# EAGLE board subpanel (EAGLE 6.3)
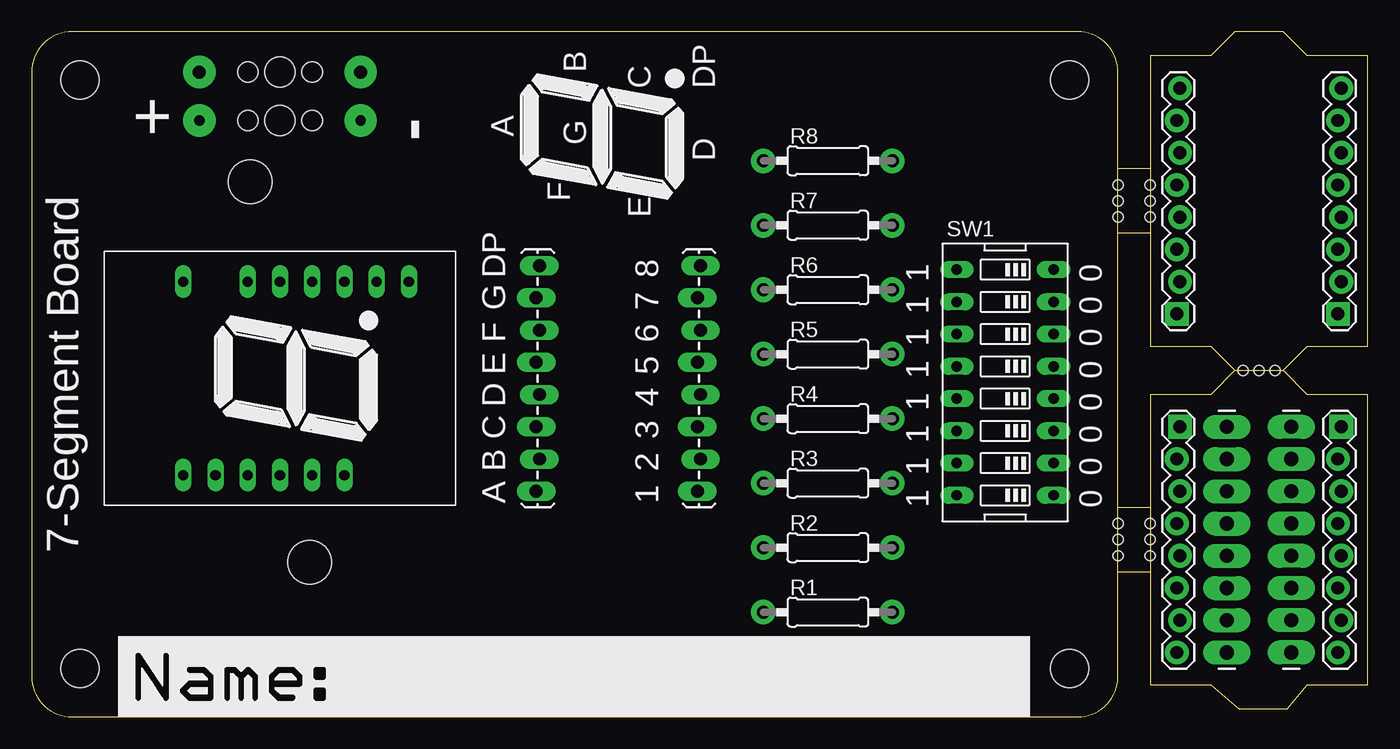
[diagram p0: board, top side]
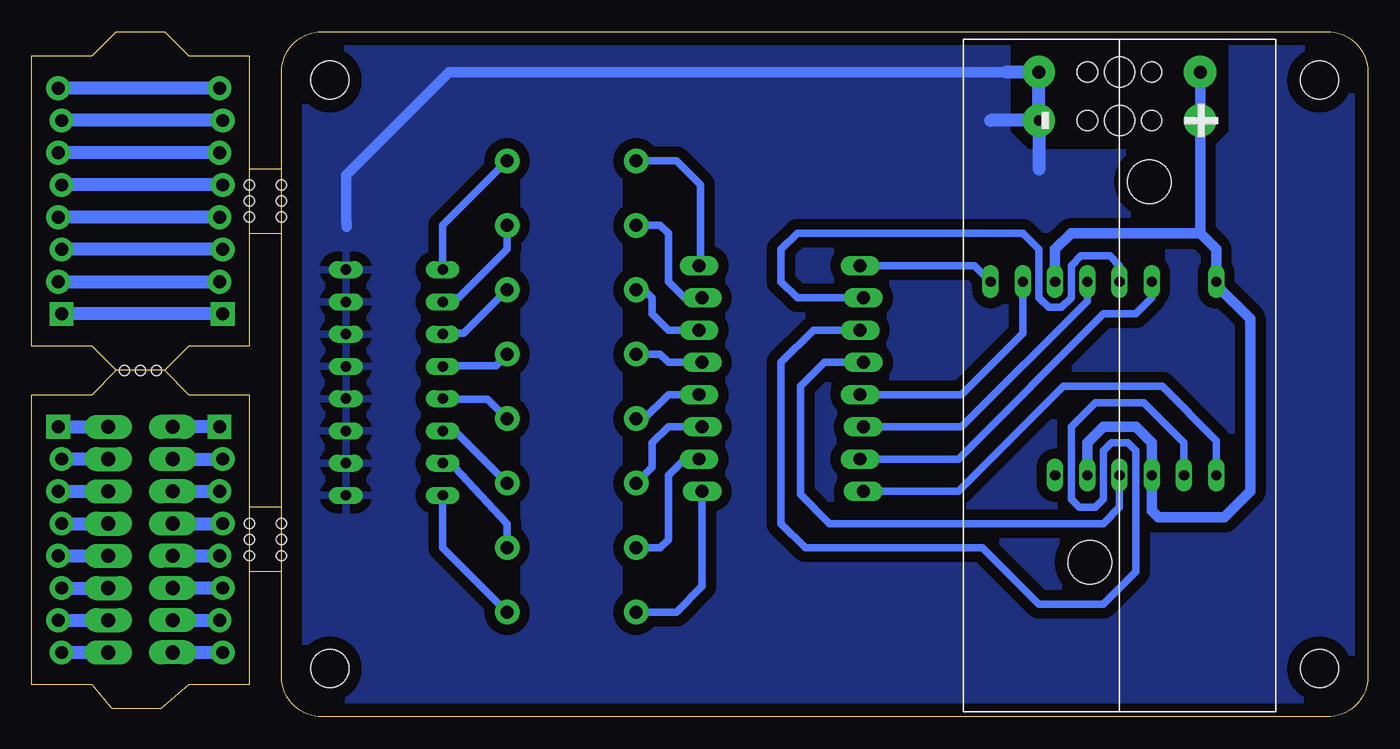
[diagram p1: board, bottom side, seen from below]

Size 105.28 x 53.98 mm. Coordinates in mm from the lower left corner, seen from the top.
Outline: 98.62,27.3 100.52,25.4 105.28,25.4 105.28,2.54 100.52,2.54 98.94,0.64 95.12,0.64 92.9,2.54 88.14,2.54 88.14,25.4 92.9,25.4 94.81,27.3
Outline: 85.6,11.43 85.6,3.2 arc-90 82.4,0 3.2,0 arc-90 0,3.2 0,50.78 arc-90 3.2,53.98 82.4,53.98 arc-90 85.6,50.78 85.6,43.18
Outline: 85.6,11.43 85.6,16.51
Outline: 85.6,16.51 85.6,38.1
Outline: 85.6,38.1 85.6,43.18
Outline: 94.81,27.3 92.9,29.21 88.14,29.21 88.14,52.07 92.9,52.07 94.81,53.97 98.62,53.97 100.52,52.07 105.28,52.07 105.28,29.21 100.52,29.21 98.62,27.3
Outline: 94.81,27.3 98.62,27.3
Outline: 88.14,38.1 85.6,38.1
Outline: 88.14,43.18 85.6,43.18
Outline: 85.6,16.51 88.14,16.51
Outline: 85.6,11.43 88.14,11.43
Copper layers (1*16): Top 0.035mm / dielectric 1.5mm / Bottom 0.035mm
Design rules "default *": minimum track width 10mil, minimum drill 24mil, track to track 8mil, track to pad 8mil, pad to pad 8mil, via to via 8mil, smd to smd 8mil, copper to edge 40mil, drill to drill 8mil, minimum pad ring 10mil, minimum via ring 8mil, stop-mask expansion 4mil, vias tented up to drill 0mil, thermal gap 30mil
Net classes: 1 larger: width 0.813 mm
Holes 3 mm at 3.81,3.81 3.81,50.17 81.79,3.81 81.79,50.17
Holes 1.6 mm at 17.02,50.8 22.1,50.8 22.1,46.99 17.02,46.99
Holes 2.4 mm at 19.56,50.8 19.56,46.99
Holes 0.8 mm at 95.44,27.3 96.71,27.3 97.98,27.3 88.14,41.91 88.14,40.64 88.14,39.37 85.6,41.91 85.6,40.64 85.6,39.37 85.6,15.24 85.6,13.97 85.6,12.7 88.14,12.7 88.14,13.97 88.14,15.24
bRestrict: area 28.4,35.6 to 29.7,38.1; area 17,35.6 to 19.6,36.8; area 18.3,14 to 20.8,15.2; area 14.5,39.4 to 15.8,45.7; area 53.9,8.9 to 57.7,43.2; area 67.8,8.9 to 71.6,43.2

## Footprints (pad centres in the part's own frame; a part is rotated, then mirrored left to right if it is on the bottom)
7SEG-0.8IN = drill 0.8 long: 1 -7.62,7.62; 2 -7.62,5.08; 3 -7.62,2.54; 4 -7.62,0; 5 -7.62,-2.54; 6 -7.62,-5.08; 9 7.62,-10.16; 10 7.62,-7.62; 11 7.62,-5.08; 12 7.62,-2.54; 13 7.62,0; 14 7.62,2.54; 16 7.62,7.62
1X08_LOCK = drill 1.016 pad 1.88 square: 1 0,0.127 | drill 1.016 pad 1.88: 2 2.54,-0.127; 3 5.08,0.127; 4 7.62,-0.127; 5 10.16,0.127; 6 12.7,-0.127; 7 15.24,0.127; 8 17.78,-0.127
1X08_LONGPADS = drill 1.118 pad 1.88 long: 1 0,0; 2 2.54,0; 3 5.08,0; 4 7.62,0; 5 10.16,0; 6 12.7,0; 7 15.24,0; 8 17.78,0
1X08_LOCK_LONGPADS = drill 1.016 long: 1 0,0.127; 2 2.54,-0.127; 3 5.08,0.127; 4 7.62,-0.127; 5 10.16,0.127; 6 12.7,-0.127; 7 15.24,0.127; 8 17.78,-0.127
0207/10 = drill 1 pad 1.93: 1 -5.08,0; 2 5.08,0
EDG-08 = drill 0.813 long: 1 -8.89,-3.81; 2 -6.35,-3.81; 3 -3.81,-3.81; 4 -1.27,-3.81; 5 1.27,-3.81; 6 3.81,-3.81; 7 6.35,-3.81; 8 8.89,-3.81; 9 8.89,3.81; 10 6.35,3.81; 11 3.81,3.81; 12 1.27,3.81; 13 -1.27,3.81; 14 -3.81,3.81; 15 -6.35,3.81; 16 -8.89,3.81
AA-2 = drill 1.02 pad 2.54: N 0,12.7; P 0,0 | hole 3.45: -8.64,4; -38.61,8.7

## Placement (x,y rotation side)
D1  [7SEG-0.8IN]  19.56,26.67 90 top
JP1  [1X08_LOCK]  103.06,22.86 270 top
JP2  [1X08_LOCK]  90.36,22.86 270 top
JP3  [1X08_LONGPADS]  99.25,5.08 90 top
JP4  [1X08_LONGPADS]  94.17,22.86 270 top
JP5  [1X08_LOCK_LONGPADS]  39.88,17.78 90 top
JP6  [1X08_LOCK_LONGPADS]  52.58,17.78 90 top
JP7  [1X08_LOCK]  90.36,31.75 90 top
JP8  [1X08_LOCK]  103.06,31.75 90 top
R1  [0207/10]  62.74,8.26 180 top
R2  [0207/10]  62.74,13.34 180 top
R3  [0207/10]  62.74,18.41 180 top
R4  [0207/10]  62.74,23.5 180 top
R5  [0207/10]  62.74,28.57 180 top
R6  [0207/10]  62.74,33.65 180 top
R7  [0207/10]  62.74,38.73 180 top
R8  [0207/10]  62.74,43.81 180 top
SW1  [EDG-08]  76.71,26.35 90 top
U$1  AAA-2  [AA-2]  13.21,50.8 90 bottom

## Library data of the parts
D1 R1-R8 = SwitchAndLockingPins
JP1-JP8 = SparkFun-Connectors
SW1 = special
U$1 = DoubleAAA

## Nets
GND [larger]: SW1.1 SW1.2 SW1.3 SW1.4 SW1.5 SW1.6 SW1.7 SW1.8 U$1.N
N$1: JP1.1 JP3.8
N$2: JP1.2 JP3.7
N$3: JP1.3 JP3.6
N$4: JP1.4 JP3.5
N$5: JP1.5 JP3.4
N$6: JP1.6 JP3.3
N$7: JP1.7 JP3.2
N$8: JP1.8 JP3.1
N$9: JP2.1 JP4.1
N$10: JP2.2 JP4.2
N$11: JP2.3 JP4.3
N$12: JP2.4 JP4.4
N$13: JP2.5 JP4.5
N$14: JP2.6 JP4.6
N$15: JP2.7 JP4.7
N$16: JP2.8 JP4.8
N$17: JP6.1 R1.2
N$18: JP6.2 R2.2
N$20: JP6.3 R3.2
N$21: JP6.4 R4.2
N$22: JP6.5 R5.2
N$23: JP6.6 R6.2
N$24: JP6.7 R7.2
N$25: JP6.8 R8.2
N$26: D1.9 JP5.8
N$27: D1.13 JP5.7
N$28: D1.2 JP5.6
N$29: D1.4 JP5.5
N$30: D1.10 JP5.4
N$31: D1.12 JP5.3
N$32: D1.14 JP5.2
N$33: D1.1 JP5.1
N$34: R1.1 SW1.16
N$35: R2.1 SW1.15
N$36: R3.1 SW1.14
N$37: R4.1 SW1.13
N$38: R5.1 SW1.12
N$39: R6.1 SW1.11
N$40: R7.1 SW1.10
N$41: R8.1 SW1.9
N$47: JP7.8 JP8.8
N$48: JP7.7 JP8.7
N$49: JP7.6 JP8.6
N$50: JP7.5 JP8.5
N$51: JP7.4 JP8.4
N$52: JP7.3 JP8.3
N$53: JP7.2 JP8.2
N$54: JP7.1 JP8.1
VCC [larger]: D1.3 D1.5 D1.11 D1.16 U$1.P

## Tracks (layer width: path | path; a pad name or v marks a point on that pad's centre or on a via)
GND  (via drill 0.8 pad 2.54)
  Bottom 0.813: 28.45,50.8 72.39,50.8 80.52,42.67 80.52,39.37 80.46,38.61
  Bottom 1.016: v25.91,46.99 25.91,43.18 | v25.91,46.99 U$1.N 28.45,50.8 | v25.91,46.99 29.72,46.99
  pour Bottom (isolate 0.813, rank 5): 83.69,1.27 83.69,53.34 28.45,53.34 28.45,46.02 26.88,44.45 12.24,44.45 10.67,46.02 10.67,53.34 0.51,53.34 0.51,1.27
N$1
  Bottom 1.016: JP1.1 JP3.8
N$2
  Bottom 1.016: JP3.7 JP1.2
N$3
  Bottom 1.016: JP1.3 JP3.6
N$4
  Bottom 1.016: JP1.4 JP3.5
N$5
  Bottom 1.016: JP1.5 JP3.4
N$6
  Bottom 1.016: JP1.6 JP3.3
N$7
  Bottom 1.016: JP1.7 JP3.2
N$8
  Bottom 1.016: JP1.8 JP3.1
N$9
  Bottom 1.016: JP2.1 JP4.1
N$10
  Bottom 1.016: JP4.2 JP2.2
N$11
  Bottom 1.016: JP4.3 JP2.3
N$12
  Bottom 1.016: JP4.4 JP2.4
N$13
  Bottom 1.016: JP4.5 JP2.5
N$14
  Bottom 1.016: JP2.6 JP4.6
N$15
  Bottom 1.016: JP4.7 JP2.7
N$16
  Bottom 1.016: JP4.8 JP2.8
N$17
  Bottom 0.61: JP6.1 52.45,10.29 54.48,8.26 R1.2
N$18
  Bottom 0.61: 52.58,20.32 JP6.2 53.85,20.32 55.12,19.05 55.12,13.97 55.76,13.34 R2.2
N$20
  Bottom 0.61: R3.2 56.39,19.68 56.39,21.59 55.12,22.86 JP6.3
N$21
  Bottom 0.61: JP6.4 55.12,25.4 57.02,23.5 R4.2
N$22
  Bottom 0.61: JP6.5 55.12,27.94 55.76,28.57 R5.2
N$23
  Bottom 0.61: JP6.6 55.12,30.48 56.39,31.75 56.39,33.02 57.02,33.65 R6.2
N$24
  Bottom 0.61: JP6.7 53.85,33.02 55.12,34.29 55.12,38.1 55.76,38.73 R7.2
N$25
  Bottom 0.61: JP6.8 52.58,35.69 52.58,41.91 54.48,43.81 R8.2
N$26
  Bottom 0.61: JP5.8 30.99,35.56 D1.9
N$27
  Bottom 0.61: D1.13 19.56,35.56 20.32,36.32 22.61,36.32 23.37,35.56 23.37,33.02 24.13,32.26 25.15,32.26 25.91,33.02 25.91,36.83 27.18,38.1 44.96,38.1 46.23,36.83 46.23,34.29 44.96,33.02 JP5.7
N$28
  Bottom 0.61: D1.2 14.48,21.59 17.66,24.77 21.46,24.77 23.37,22.86 23.37,17.14 22.73,16.51 21.46,16.51 20.83,17.14 20.83,20.96 20.2,21.59 18.93,21.59 18.29,20.96 18.29,11.43 20.83,8.89 25.91,8.89 30.36,13.34 44.33,13.34 46.23,15.24 46.23,27.94 43.69,30.48 JP5.6
N$29
  Bottom 0.61: D1.4 19.56,16.51 20.83,15.24 42.42,15.24 44.71,17.53 44.71,26.04 42.8,27.94 JP5.5 41.53,27.94
N$30
  Bottom 0.61: D1.10 27.18,30.23 32.01,25.4 JP5.4
N$31
  Bottom 0.61: D1.12 22.1,32.77 32.01,22.86 JP5.3
N$32
  Bottom 0.61: JP5.2 32.26,20.32 20.83,31.75 18.29,31.75 17.02,33.02 D1.14
N$33
  Bottom 0.61: D1.1 11.94,21.78 16.2,26.04 24,26.04 32.26,17.78 JP5.1
N$34
  Bottom 0.61: SW1.16 72.9,13.34 R1.1
N$35
  Bottom 0.61: R2.1 67.82,15.24 71.95,19.68 72.33,19.68 72.9,19.94 SW1.15
N$36
  Bottom 0.61: R3.1 71.88,22.48 72.9,22.48 SW1.14
N$37
  Bottom 0.61: R4.1 69.34,25.02 72.9,25.02 SW1.13
N$38
  Bottom 0.61: R5.1 68.71,27.69 72.9,27.69 SW1.12
N$39
  Bottom 0.61: R6.1 71.25,30.23 72.9,30.23 SW1.11
N$40
  Bottom 0.61: R7.1 67.82,38.1 67.82,37.85 67.82,36.83 71.63,33.02 72.65,33.02 72.9,32.77 SW1.10
N$41
  Bottom 0.61: SW1.9 72.9,38.73 R8.1
N$44
  pour Bottom (isolate 2.718): 44.33,35.56 44.33,16.51 41.15,16.51 41.15,35.56
N$47
  Bottom 1.016: JP7.8 JP8.8
N$48
  Bottom 1.016: JP7.7 JP8.7
N$49
  Bottom 1.016: JP7.6 JP8.6
N$50
  Bottom 1.016: JP7.5 JP8.5
N$51
  Bottom 1.016: JP7.4 JP8.4
N$52
  Bottom 1.016: JP7.3 JP8.3
N$53
  Bottom 1.016: JP8.2 JP7.2
N$54
  Bottom 1.016: JP7.1 JP8.1
VCC  (via drill 0.8 pad 2.54)
  Bottom 0.813: D1.5 22.1,21.59 20.83,22.86 18.29,22.86 17.02,21.59 D1.3 | 16.89,18.67 D1.3 | D1.3 17.02,16.26 16.51,15.75 11.3,15.75 9.27,17.78 9.27,31.37 11.81,33.91 D1.16 11.94,36.83 13.21,38.1 | 13.21,38.1 v13.21,46.99 U$1.P | D1.11 24.64,36.83 23.37,38.1 13.21,38.1

## Text on the board
tPlace: B | C | DP | + | - | A | G | D | F | E | DP | 8 | 1 | 0 | G | 7 | 1 | 0 | F | 6 | 1 | 0 | 7-Segment Board | E | 5 | 1 | 0 | D | 4 | 1 | 0 | C | 3 | 1 | 0 | B | 2 | 1 | 0 | A | 1 | 1 | 0